# Altium PCB core_layer.PcbDoc
Units mm, origin at the board's own origin, x right, y up, seen from the top; angles counter-clockwise.
Board outline 117.5 x 67.25 mm, 2 copper layers (Top Layer, Bottom Layer); 38 components, 132 nets, 247 pads, 45 vias.
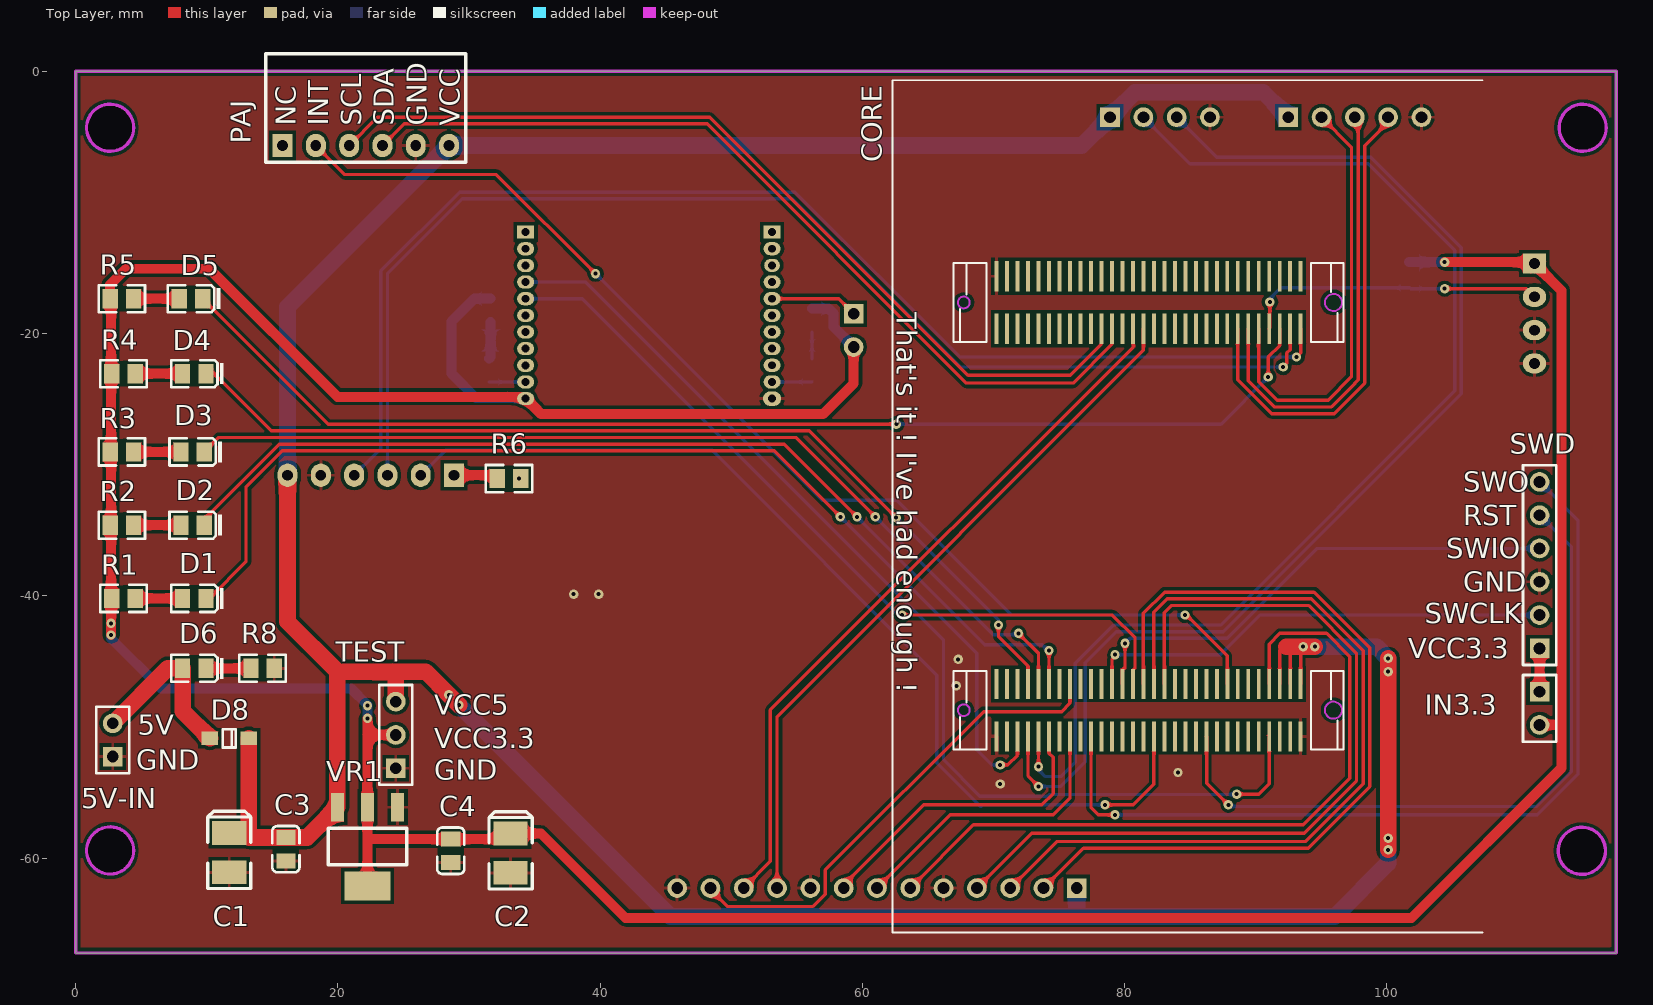
[diagram p0: Top Layer view]
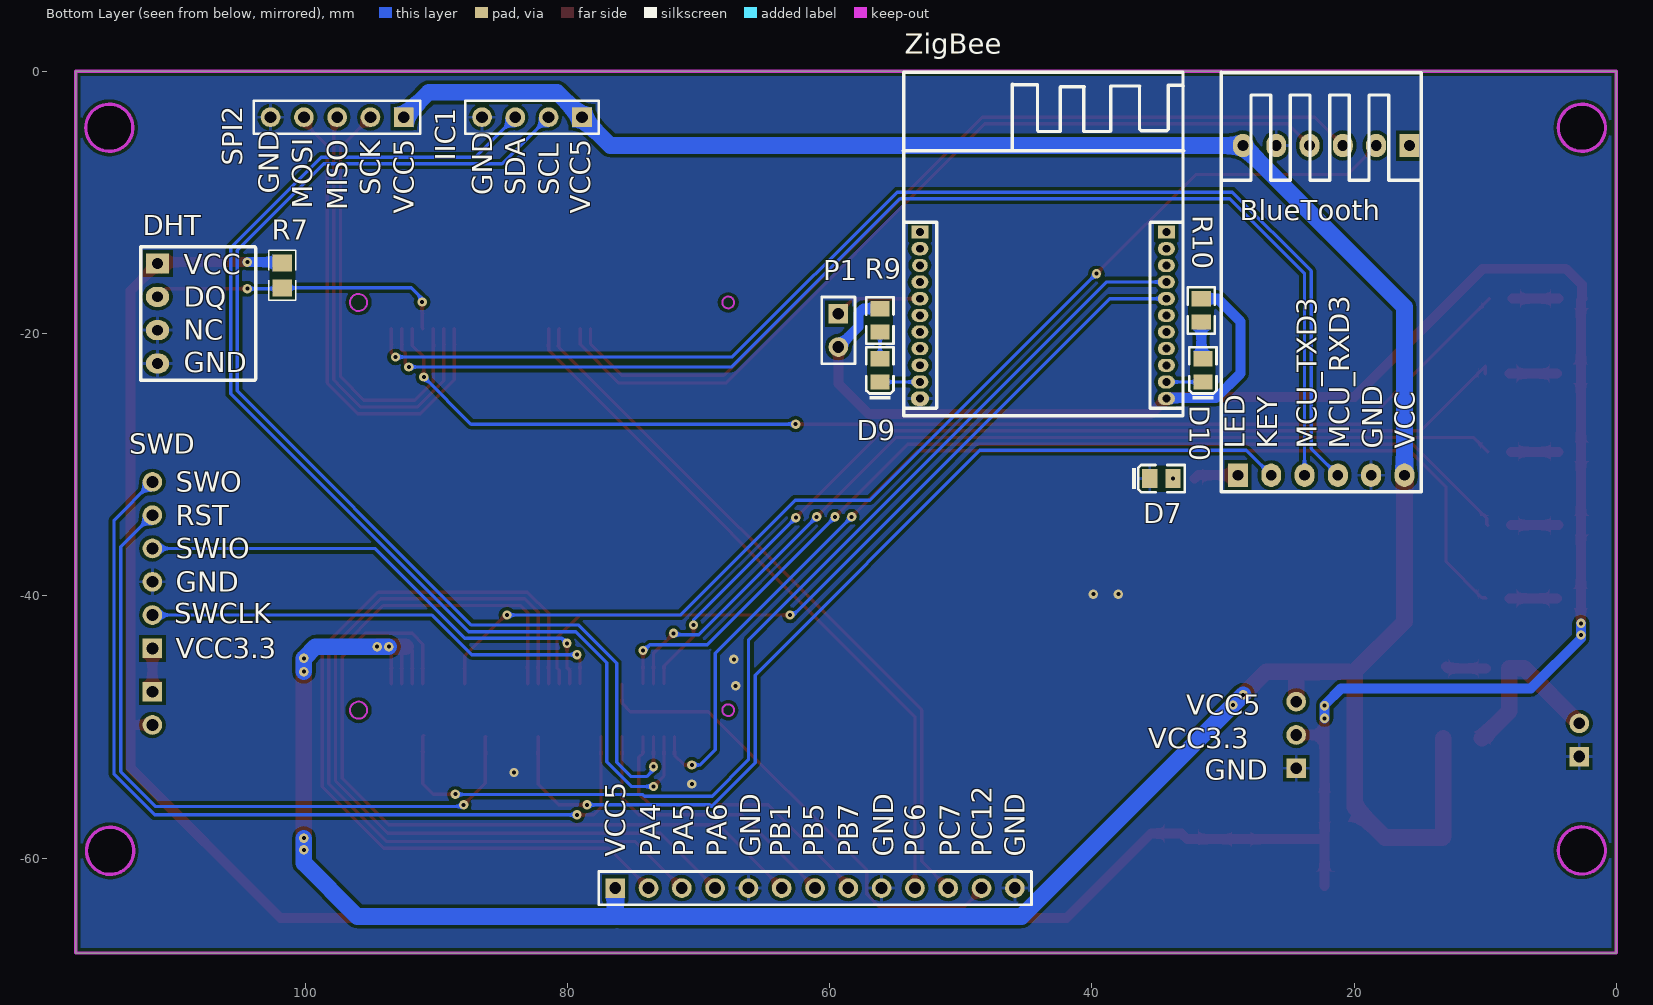
[diagram p1: Bottom Layer view, seen from below]
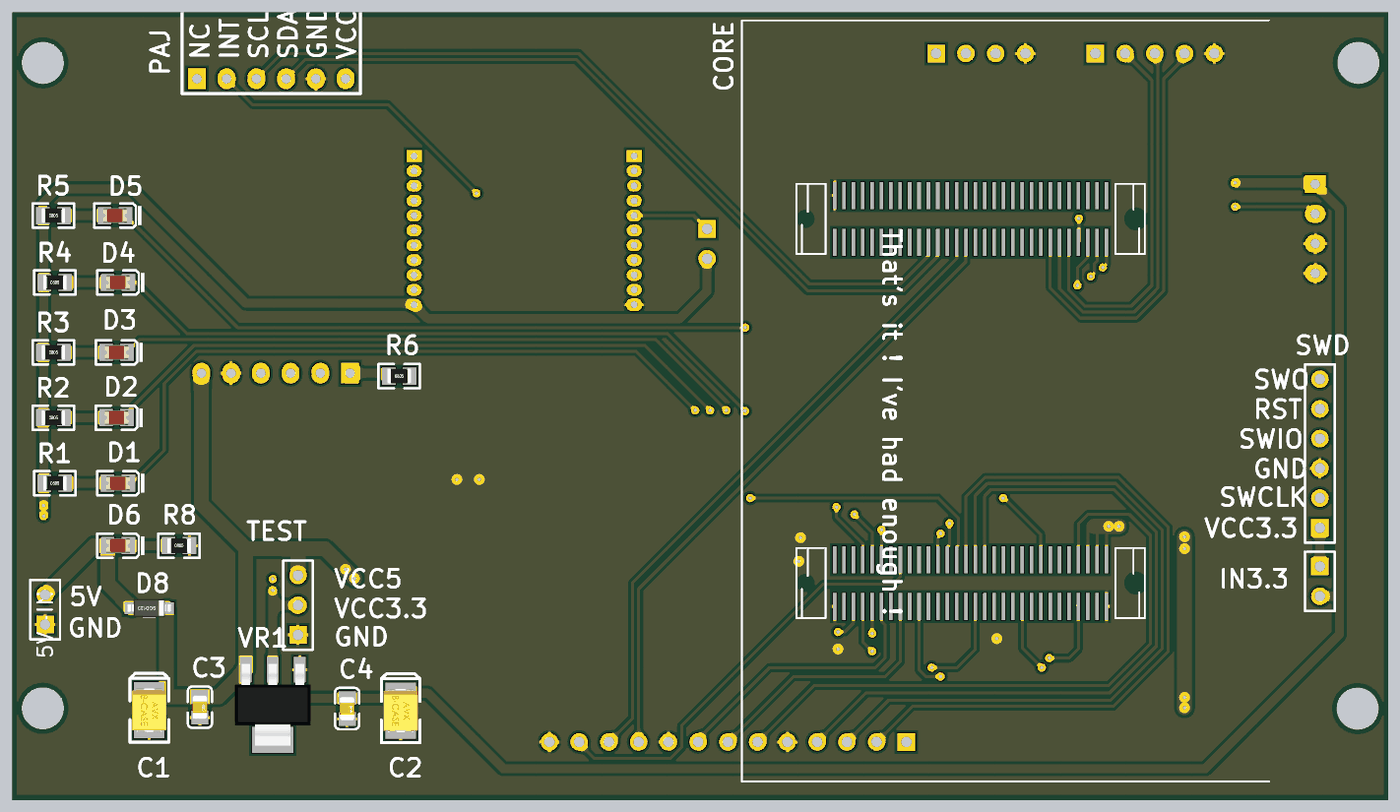
[diagram p2: 3D render of the assembled board from above, using the file's embedded part models]

## Layer stack, top to bottom
Top Solder: solder mask 0.0102, Solder Resist, Dk 3.5
Top Layer: signal copper 0.0356
Dielectric 1: dielectric 0.32, FR-4, Dk 4.8
Bottom Layer: signal copper 0.0356
Bottom Solder: solder mask 0.0102, Solder Resist, Dk 3.5

## Board outline
0,-67.25 117.5,-67.25 117.5,0 0,0
cut-out: 113.08,-59.45 ccw(c114.88,-59.45) 114.88,-61.25 ccw(c114.88,-59.45) 116.68,-59.45 ccw(c114.88,-59.45) 114.88,-57.65 ccw(c114.88,-59.45)
cut-out: 113.14,-4.3 ccw(c114.94,-4.3) 114.94,-6.1 ccw(c114.94,-4.3) 116.74,-4.3 ccw(c114.94,-4.3) 114.94,-2.5 ccw(c114.94,-4.3)
cut-out: 2.62,-61.225 cw(c2.62,-59.425) 0.82,-59.425 cw(c2.62,-59.425) 2.62,-57.625 cw(c2.62,-59.425) 4.42,-59.425 cw(c2.62,-59.425)
cut-out: 2.62,-6.1 cw(c2.62,-4.3) 0.82,-4.3 cw(c2.62,-4.3) 2.62,-2.5 cw(c2.62,-4.3) 4.42,-4.3 cw(c2.62,-4.3)

## Design rules (kind name [scope] priority, off if disabled: settings)
Clearance [All] p1: gap=0.254 ignorepadtopadclearanceinfootprint=TRUE except(0: Arc-Hole Track-Hole SMDPad-Hole THPad-Hole Via-Hole Fill-Hole Poly-Hole Region-Hole Text-Hole)
PolygonConnect [All] p1: connectstyle=Relief reliefconductorwidth=0.254 reliefentries=4 polygonreliefangle="90 Angle" airgapwidth=0.254
RoutingVias [All] p1: holewidth=0.711 width=1.27 viastyle="Through Hole" minholewidth=0.711 minwidth=1.27 maxholewidth=0.711 maxwidth=1.27
SolderMaskExpansion [All] p1: expansion=0.102
Width [All] p1: maxlimit=1.27 minlimit=0.254 preferedwidth=0.762
30 further rules are at their usual default settings.

## Classes and differential pairs
component class core_layer: 5V-IN CORE D1 D2 D3 D4 D5 D6 D9 D10 DHT IIC1 IN3.3 M1 PAJ R1 R2 R3 R4 R5 R7 SPI2 SWD TEST

## Components (designator, comment, footprint, x,y, rotation, side; value= is the part's Value field where it differs from the comment)
5V-IN "Header 2" HDR2X1_A 2.819,-52.264 r90 top
BlueTooth "ATK-BC05-V12" ATK-BC05-V12 28.854,-30.801 r90 bottom
C1 "100uF (107) ±10% 6.3V" CASE-B_3528 11.709,-59.592 r90 top
C2 "100uF (107) ±10% 6.3V" CASE-B_3528 33.172,-59.63 r90 top
C3 "100nF(104) 10% 50V" 0805_C 16.027,-59.326 r270 top
C4 "100nF(104) 10% 50V" 0805_C 28.6,-59.446 r270 top
CORE "STM32F4&F7_CB" STM32F4&F7_CB 93.433,-50.725 r90 top
D1 "黄灯 0805" 0805_LED_S1 9.042,-40.199 r180 top
D2 "黄灯 0805" 0805_LED_S1 8.915,-34.611 r180 top
D3 "黄灯 0805" 0805_LED_S1 8.915,-29.023 r180 top
D4 "黄灯 0805" 0805_LED_S1 9.042,-23.054 r180 top
D5 "黄灯 0805" 0805_LED_S1 8.788,-17.339 r180 top
D6 "红灯 0805" 0805_LED_S1 9.042,-45.533 r180 top
D7 "红灯 0805" 0805_LED_S1 34.696,-31.055 r180 bottom
D8 "B5819W  SL" SOD-123 11.709,-50.867 r180 top
D9 "红灯 0805" 0805_LED_S1 56.159,-22.8 r90 bottom
D10 "红灯 0805" 0805_LED_S1 31.521,-22.8 r90 bottom
DHT "DHT11" DTH11 110.261,-17.466 r180 bottom
IIC1 "Header 4" HDR1X4 78.892,-3.496 r0 bottom
IN3.3 "Header 2" HDR1X2 111.658,-47.311 r270 top
P1 "Header 2" HDR1X2 59.334,-18.482 r270 bottom
PAJ "ATK-PAJ7620U2" ATK-AJ7620U2 15.773,-5.655 r90 top
R1 "4.7KΩ (4701) ±1%" 0805_R 3.642,-40.199 r0 top
R2 "4.7KΩ (4701) ±1%" 0805_R 3.515,-34.611 r0 top
R3 "4.7KΩ (4701) ±1%" 0805_R 3.515,-29.023 r0 top
R4 "4.7KΩ (4701) ±1%" 0805_R 3.642,-23.054 r0 top
R5 "4.7KΩ (4701) ±1%" 0805_R 3.515,-17.339 r0 top
R6 "4.7KΩ (4701) ±1%" 0805_R 33.045,-31.055 r0 top
R7 "Res1" 0805-1 101.752,-15.561 r270 bottom value=4.7K
R8 "10KΩ (1002) ±1%" 0805_R 14.249,-45.533 r0 top
R9 "4.7KΩ (4701) ±1%" 0805_R 56.159,-18.99 r270 bottom
R10 "4.7KΩ (4701) ±1%" 0805_R 31.648,-18.228 r90 bottom
SPI2 "Header 5" HDR1X5 92.481,-3.496 r0 bottom
SWD "Header 6" HDR1X6 111.658,-44.009 r90 top
TEST "Header 3" HDR1X3 24.409,-53.153 r90 top
VR1 "AMS1117-3.3" SOT-223 22.25,-59.122 r90 top
ZigBee "ZigBeeXL2530-D01" "ZigBee XL2530-D01" 43.637,-26.285 r180 bottom
? "Header 13" HDR1X13 76.352,-62.297 r180 bottom

## Footprints (in the part's own frame and the unit in brackets; to place one, negate y for a bottom-side part, rotate by r counter-clockwise, add the part's x,y. Pads: shape width x height; smd on the part's side, far side on the other; paste and mask are expansions set on the pad)
0805-1 [mm] "贴片带丝印"
  rect 1.3x1.5 smd: 1(-0.95,0) 2(0.95,0)
  silkscreen extent -1.91,-1.02 1.91,1.02, body extent -1.14,-0.51 1.14,0.51, height 1
0805_C [mm]
  rect 1.16x1.47 smd: 1(-0.89,0) 2(0.89,0)
  silkscreen extent -1.77,-1.04 1.77,1.04, body extent -1,-0.62 1,0.63, height 0.77
0805_LED_S1 [mm]
  rect 1.16x1.47 smd: A(0.89,0) K(-0.89,0)
  silkscreen extent -2.25,-1.04 1.77,1.03, body extent -1.01,-0.62 1.01,0.62, height 1.1
0805_R [mm]
  rect 1.16x1.47 smd: 1(-0.89,0) 2(0.89,0)
  silkscreen extent -1.77,-1.04 1.77,1.03, body extent -1,-0.62 1,0.63, height 0.49
ATK-AJ7620U2 [mil]
  rect 70x60 hole 32: 1(0,0)
  oval 70x60 hole 32: 2(0,-100) 3(0,-200) 4(0,-300) 5(0,-400) 6(0,-500)
  silkscreen extent -50,-550 276,50
ATK-BC05-V12 [mil]
  rect 70x60 hole 32: 1(0,0)
  oval 70x60 hole 32: 2(0,-100) 3(0,-200) 4(0,-300) 5(0,-400) 6(0,-500)
  silkscreen extent -50,-550 1210,50
CASE-B_3528 [mm]
  rect 1.8x2.6 smd: 1(1.5,0) 2(-1.5,0)
  silkscreen extent -2.73,-1.65 3.16,1.65, body extent -1.85,-1.47 1.85,1.46, height 2.03
DTH11 [mil]
  rect 70x60 hole 32: 1(-39.37,110.63)
  oval 70x60 hole 32: 2(-39.37,10.63) 3(-39.37,-89.37) 4(-39.37,-189.37)
  silkscreen extent -89,-239 256,161
HDR1X2 [mm] "Connector; Header; 2 Position"
  rect 1.5x1.5 hole 0.9: 1(0,0)
  round 1.5 hole 0.9: 2(2.54,0)
  silkscreen extent -1.27,-1.27 3.81,1.27
HDR1X3 [mm] "Connector; Header; 3 Position"
  rect 1.5x1.5 hole 0.9: 1(0,0)
  round 1.5 hole 0.9: 2(2.54,0) 3(5.08,0)
  silkscreen extent -1.27,-1.27 6.35,1.27
HDR1X4 [mm]
  rect 1.5x1.5 hole 0.9: 1(0,0)
  round 1.5 hole 0.9: 2(2.54,0) 3(5.08,0) 4(7.62,0)
  silkscreen extent -1.27,-1.27 8.89,1.27
HDR1X5 [mm] "Connector; Header; 5 Position"
  rect 1.5x1.5 hole 0.9: 1(0,0)
  round 1.5 hole 0.9: 2(2.54,0) 3(5.08,0) 4(7.62,0) 5(10.16,0)
  silkscreen extent -1.27,-1.27 11.43,1.27
HDR1X6 [mm] "Connector; Header; 6 Position"
  rect 1.5x1.5 hole 0.9: 1(0,0)
  round 1.5 hole 0.9: 2(2.54,0) 3(5.08,0) 4(7.62,0) 5(10.16,0) 6(12.7,0)
  silkscreen extent -1.27,-1.27 13.97,1.27
HDR1X13 [mm] "Connector; Header; 13 Position"
  rect 1.5x1.5 hole 0.9: 1(0,0)
  round 1.5 hole 0.9: 2(2.54,0) 3(5.08,0) 4(7.62,0) 5(10.16,0) 6(12.7,0) 7(15.24,0) 8(17.78,0) 9(20.32,0) 10(22.86,0) 11(25.4,0) 12(27.94,0) 13(30.48,0)
  silkscreen extent -1.27,-1.27 31.75,1.27
HDR2X1_A [mm] "Connector; Header; 2 Position"
  rect 1.5x1.5 hole 0.9: 1(0,0)
  round 1.5 hole 0.9: 2(2.54,0)
  silkscreen extent -1.27,-1.27 3.81,1.27
SOD-123 [mm]
  rect 1.25x1 smd: 1(1.475,0) 2(-1.475,0)
  silkscreen extent -0.5,-0.7 0.5,0.7, body extent -1.85,-0.77 1.85,0.78, height 1.35
SOT-223 [mm]
  rect 2.2x1 smd: 1(3,-2.3) 2(3,0) 3(3,2.3)
  rect 2.2x3.5 smd: 2(-3,0)
  silkscreen extent -1.4,-3 1.4,3, body extent -3.49,-3.24 3.49,3.24, height 1.64
STM32F4&F7_CB [mm]
  rect 2.3x0.3 smd: J1_1(0,0) J1_2(0,0.8) J1_3(0,1.6) J1_4(0,2.4) J1_5(0,3.2) J1_6(0,4) J1_7(0,4.8) J1_8(0,5.6) J1_9(0,6.4) J1_10(0,7.2) J1_11(0,8) J1_12(0,8.8) J1_13(0,9.6) J1_14(0,10.4) J1_15(0,11.2) J1_16(0,12) J1_17(0,12.8) J1_18(0,13.6) J1_19(0,14.4) J1_20(0,15.2) J1_21(0,16) J1_22(0,16.8) J1_23(0,17.6) J1_24(0,18.4) J1_25(0,19.2) J1_26(0,20) J1_27(0,20.8) J1_28(0,21.6) J1_29(0,22.4) J1_30(0,23.2) J1_31(4,23.2) J1_32(4,22.4) J1_33(4,21.6) J1_34(4,20.8) J1_35(4,20) J1_36(4,19.2) J1_37(4,18.4) J1_38(4,17.6) J1_39(4,16.8) J1_40(4,16) J1_41(4,15.2) J1_42(4,14.4) J1_43(4,13.6) J1_44(4,12.8) J1_45(4,12) J1_46(4,11.2) J1_47(4,10.4) J1_48(4,9.6) J1_49(4,8.8) J1_50(4,8) J1_51(4,7.2) J1_52(4,6.4) J1_53(4,5.6) J1_54(4,4.8) J1_55(4,4) J1_56(4,3.2) J1_57(4,2.4) J1_58(4,1.6) J1_59(4,0.8) J1_60(4,0) J2_1(31.1,0.001) J2_2(31.1,0.801) J2_3(31.1,1.601) J2_4(31.1,2.401) J2_5(31.1,3.201) J2_6(31.1,4.001) J2_7(31.1,4.801) J2_8(31.1,5.601) J2_9(31.1,6.401) J2_10(31.1,7.201) J2_11(31.1,8.001) J2_12(31.1,8.801) J2_13(31.1,9.601) J2_14(31.1,10.401) J2_15(31.1,11.201) J2_16(31.1,12.001) J2_17(31.1,12.801) J2_18(31.1,13.601) J2_19(31.1,14.401) J2_20(31.1,15.201) J2_21(31.1,16.001) J2_22(31.1,16.801) J2_23(31.1,17.601) J2_24(31.1,18.401) J2_25(31.1,19.201) J2_26(31.1,20.001) J2_27(31.1,20.801) J2_28(31.1,21.601) J2_29(31.1,22.401) J2_30(31.1,23.201) J2_31(35.1,23.201) J2_32(35.1,22.401) J2_33(35.1,21.601) J2_34(35.1,20.801) J2_35(35.1,20.001) J2_36(35.1,19.201) J2_37(35.1,18.401) J2_38(35.1,17.601) J2_39(35.1,16.801) J2_40(35.1,16.001) J2_41(35.1,15.201) J2_42(35.1,14.401) J2_43(35.1,13.601) J2_44(35.1,12.801) J2_45(35.1,12.001) J2_46(35.1,11.201) J2_47(35.1,10.401) J2_48(35.1,9.601) J2_49(35.1,8.801) J2_50(35.1,8.001) J2_51(35.1,7.201) J2_52(35.1,6.401) J2_53(35.1,5.601) J2_54(35.1,4.801) J2_55(35.1,4.001) J2_56(35.1,3.201) J2_57(35.1,2.401) J2_58(35.1,1.601) J2_59(35.1,0.801) J2_60(35.1,0.001)
  Keep-Out Layer circle w0.152: c2,25.7 r0.45
  Keep-Out Layer circle w0.152: c2,-2.5 r0.65
  Keep-Out Layer circle w0.152: c33.1,-2.499 r0.65
  Keep-Out Layer circle w0.152: c33.1,25.701 r0.45
  silkscreen extent -14.95,-13.87 50.05,31.13
"ZigBee XL2530-D01" [mm]
  rect 1.3x1 hole 0.6: 1(9.322,14.028) 22(-9.474,14.028)
  oval 1.3x1 hole 0.6: 2(9.322,12.756) 3(9.322,11.486) 4(9.322,10.216) 5(9.322,8.946) 6(9.322,7.676) 7(9.322,6.406) 8(9.322,5.136) 9(9.322,3.866) 10(9.322,2.596) 11(9.322,1.326) 13(-9.474,2.598) 14(-9.474,3.868) 15(-9.474,5.138) 16(-9.474,6.408) 17(-9.474,7.678) 18(-9.474,8.948) 19(-9.474,10.218) 21(-9.474,12.758)
  oval 1.4x1.1 hole 0.6: 12(-9.474,1.326)
  oval 1.2x1 hole 0.6: 20(-9.474,11.488)
  silkscreen extent -10.75,0.03 10.65,26.22

## Part data
5V-IN: "接插件", LatestRevisionDate=17-Jul-2002, LatestRevisionNote="Re-released for DXP Platform.", Publisher="Altium Limited"
C1 C2: library part "3528 100uF (107) 10% 6.3V", "钽电容", Package=3528, SuppliersPartNumber=C16133, ComponentLink1Description=供应商, ComponentLink1URL=http://www.szlcsc.com/product/details_16815.html, Supplier=LC
C3 C4: library part "0805 100nF(104) 10% 50V", "贴片电容", Package=0805, SuppliersPartNumber=C49678, ComponentLink1Description=供应商, ComponentLink1URL=http://www.szlcsc.com/product/details_50686.html, Supplier=LC
CORE: "F429/746 Core Board"
D1 D2 D3 D4 D5: library part "0805 黄灯", "发光二极管", Package=0805, SuppliersPartNumber=C2296, ComponentLink1Description=供应, ComponentLink1URL=http://www.szlcsc.com/product/details_2669.html, Supplier=LC
D6 D7 D9 D10: library part "0805 红灯", "发光二极管", Package=0805, SuppliersPartNumber=C2295, ComponentLink1URL=http://www.szlcsc.com/product/details_2668.html, Supplier=LC
  D6 D9 D10: ComponentLink1Description=供应
  D7: ComponentLink1Description=供应商
D8: library part "SOD-123 B5819W  SL", "肖特基二极管", Package=SOD-123, SuppliersPartNumber=C8598, ComponentLink1Description=供应商, ComponentLink1URL=http://www.szlcsc.com/product/details_9093.html, Supplier=LC
IIC1: "Header, 4-Pin", LatestRevisionDate=17-Jul-2002, LatestRevisionNote="Re-released for DXP Platform.", Publisher="Altium Limited"
IN3.3 P1: "Header, 2-Pin", LatestRevisionDate=17-Jul-2002, LatestRevisionNote="Re-released for DXP Platform.", Publisher="Altium Limited"
R1 R2 R3 R4 R5 R6 R9 R10: library part "0805 4.7KΩ (4701) 1%", "贴片电阻", Package=0805, SuppliersPartNumber=C17673, ComponentLink1URL=http://www.szlcsc.com/product/details_18361.html, Supplier=LC
  R1 R2 R3 R4 R5: ComponentLink1Description=供应
  R6 R9 R10: ComponentLink1Description=供应商
R7: "贴片电阻", LatestRevisionDate=17-Jul-2002, LatestRevisionNote="Re-released for DXP Platform.", PackageReference=AXIAL-0.4, Published=8-Jun-2000, Publisher="Altium Limited"
R8: library part "0805 10KΩ (1002) 1%", "贴片电阻", Package=0805, SuppliersPartNumber=C17414, ComponentLink1Description=供应商, ComponentLink1URL=http://www.szlcsc.com/product/details_18102.html, Supplier=LC
SPI2: "Header, 5-Pin", LatestRevisionDate=17-Jul-2002, LatestRevisionNote="Re-released for DXP Platform.", Publisher="Altium Limited"
SWD: "Header, 6-Pin", LatestRevisionDate=17-Jul-2002, LatestRevisionNote="Re-released for DXP Platform.", Publisher="Altium Limited"
TEST: "Header, 3-Pin", LatestRevisionDate=17-Jul-2002, LatestRevisionNote="Re-released for DXP Platform.", Publisher="Altium Limited"
VR1: library part "SOT-223 AMS1117-3.3", "低压差线性稳压(LDO)", Package=SOT-223, SuppliersPartNumber=C6186, ComponentLink1Description=供应商, ComponentLink1URL=http://www.szlcsc.com/product/details_6652.html, Supplier=LC
?: "Header, 13-Pin", LatestRevisionDate=17-Jul-2002, LatestRevisionNote="Re-released for DXP Platform.", Publisher="Altium Limited"

## Via types
v1: diameter 0.711, hole 0.305, Top Layer to Bottom Layer, 45 vias

## Nets (pads, with @x,y where several pads share a name; then routed paths per layer and width w, separated by ;. In a path a pad name is that pad's centre, name@x,y a point inside that pad or via, vN(x,y) a via of type N, cw(c..) or ccw(c..) an arc to the next point about the centre after c; other vN are vias at no path point)
BC_LED: BlueTooth.1 R6.1 | length 3.4
  Top Layer w0.762: BlueTooth.1 31.901,-30.801 R6.1
BOOT0: CORE.J1_31
GND: 5V-IN.1 ?.5 ?.9 ?.13 BlueTooth.5 C1.2 C2.2 C3.2 C4.2 CORE.J1_1 CORE.J1_30 CORE.J2_31 D7.K DHT.3 DHT.4 IIC1.4 PAJ.5 R8.2 SPI2.5 SWD.3 TEST.1 VR1.1 ZigBee.12
  other v1: 70.51,-54.356 84.074,-53.473 67.17,-46.863 67.31,-44.85 37.973,-39.878 39.887,-39.878
IIC_SCL: CORE.J1_26 IIC1.2 | length 89.8
  Top Layer w0.254: v1(73.431,-53.026) 73.433,-53.024 CORE.J1_26
  Bottom Layer w0.254: v1(73.431,-53.026) 73.431,-53.28 73.71,-53.559 73.736,-53.559 73.965,-53.788 75.126,-53.788 76.225,-52.689 76.225,-45.152 79.146,-42.231 87.318,-42.231 105.181,-24.368 105.181,-13.656 98.577,-7.052 84.988,-7.052 IIC1.2
IIC_SDA: CORE.J1_27 IIC1.3 | length 90.2
  Top Layer w0.254: CORE.J1_27 72.633,-53.748 v1(73.431,-54.546)
  Bottom Layer w0.254: v1(73.431,-54.546) 75.086,-54.546 76.987,-52.645 76.987,-45.108 79.356,-42.739 87.528,-42.739 105.689,-24.578 105.689,-13.446 98.787,-6.544 87.02,-6.544 IIC1.3
LED1: CORE.J1_28 D1.K | length 85.8
  Top Layer w0.254: D1.K 9.992,-40.139 10.245,-40.139 12.979,-37.405 12.979,-31.69 12.986,-31.69 15.738,-28.938 53.28,-28.938 v1(58.318,-33.976) ; v1(70.51,-52.899) 71.08,-52.899 71.833,-52.146 CORE.J1_28
  Bottom Layer w0.254: v1@58.381,-34.04 68.732,-44.39 68.732,-51.756 69.875,-52.899 v1(70.51,-52.899)
LED2: CORE.J1_36 D2.K | length 76.4
  Top Layer w0.254: D2.K 9.865,-34.551 9.865,-34.086 15.521,-28.43 54.042,-28.43 v1(59.588,-33.976) ; v1@74.197,-44.212 v1(74.233,-44.176) CORE.J1_36
  Bottom Layer w0.254: v1(59.588,-33.976) 69.342,-43.73 73.71,-43.73 74.157,-44.176 v1(74.233,-44.176)
LED3: CORE.J1_35 D3.K | length 73.3
  Top Layer w0.254: D3.K 10.906,-27.922 54.931,-27.922 v1(60.985,-33.976) ; v1(71.907,-42.866) 73.433,-44.392 CORE.J1_35
  Bottom Layer w0.254: v1(60.985,-33.976) 69.977,-42.968 71.805,-42.968 v1(71.907,-42.866)
LED4: CORE.J1_34 D4.K | length 74.8
  Top Layer w0.254: D4.K@9.992,-23.054 9.992,-22.485 14.921,-27.414 55.947,-27.414 v1(62.572,-34.04) ; v1(70.383,-42.231) 70.383,-43.12 72.633,-45.37 CORE.J1_34
  Bottom Layer w0.254: v1(62.572,-34.04) 70.383,-41.85 v1(70.383,-42.231)
LED5: CORE.J2_3 D5.K | length 90.8
  Top Layer w0.254: D5.K 19.245,-26.906 v1(62.594,-26.906) ; v1(90.957,-23.308) 90.957,-21.784 91.832,-20.909 CORE.J2_3
  Bottom Layer w0.254: v1(62.594,-26.906) 87.359,-26.906 v1(90.957,-23.308)
Net5V-IN_2: 5V-IN.2 D6.A D8.1 | length 13.3
  Top Layer w1.27: 5V-IN.2 7.01,-45.533 D6.A 8.152,-48.785 D8.1
NetD1_A: D1.A R1.2 | length 3.6
  Top Layer w0.762: R1.2 D1.A
NetD2_A: D2.A R2.2 | length 3.6
  Top Layer w0.762: R2.2 D2.A
NetD3_A: D3.A R3.2 | length 3.6
  Top Layer w0.762: R3.2 D3.A
NetD4_A: D4.A R4.2 | length 3.6
  Top Layer w0.762: R4.2 D4.A
NetD5_A: D5.A R5.2 | length 3.5
  Top Layer w0.762: R5.2 D5.A
NetD6_K: D6.K R8.1 | length 3.1
  Top Layer w0.762: D6.K 12.851,-45.533 R8.1@12.978,-45.406
NetD7_A: D7.A R6.2
  other v1: 33.806,-31.055
NetD9_A: D9.A R9.2 | length 2
  Bottom Layer w0.254: D9.A R9.2
NetD9_K: D9.K ZigBee.13 | length 3
  Bottom Layer w0.254: ZigBee.13 56.156,-23.687 D9.K
NetD10_A: D10.A R10.1 | length 2.8
  Bottom Layer w0.762: D10.A 31.648,-21.783 R10.1
NetD10_K: D10.K ZigBee.10 | length 2.8
  Bottom Layer w0.254: D10.K ZigBee.10 ZigBee.10
NetIN3.3_1: IN3.3.1 SWD.1 | length 3.3
  Top Layer w0.762: IN3.3.1 SWD.1
NetP1_1: P1.1 ZigBee.18 | length 6.7
  Top Layer w0.254: ZigBee.18 58.189,-17.337 P1.1
PA0: CORE.J2_42
PA1: CORE.J1_3
PA2: CORE.J1_4 ZigBee.4 | length 82.5
  Top Layer w0.254: v1(88.544,-55.134) 90.246,-55.134 91.033,-54.347 CORE.J1_4 CORE.J1_4@90.957,-50.649
  Bottom Layer w0.254: ZigBee.4 38.887,-16.069 66.192,-43.374 66.192,-52.518 68.957,-55.283 74.117,-55.283 74.24,-55.16 88.569,-55.16 v1(88.544,-55.134)
PA3: CORE.J1_44 ZigBee.5 | length 60.8
  Top Layer w0.254: v1(63.017,-41.469) 79.071,-41.469 80.797,-43.195 80.797,-45.496 80.633,-45.66 CORE.J1_44
  Bottom Layer w0.254: ZigBee.5 38.633,-17.339 62.763,-41.469 v1(63.017,-41.469)
PA4: ?.2 CORE.J1_45 | length 63.8
  Top Layer w0.254: ?.2 76.86,-59.249 94.001,-59.249 98.704,-54.546 98.704,-43.969 94.451,-39.716 83.052,-39.716 81.433,-41.336 CORE.J1_45
PA5: ?.3 CORE.J1_46 | length 63.9
  Top Layer w0.254: ?.3 74.828,-58.741 93.791,-58.741 98.196,-54.336 98.196,-44.18 94.241,-40.224 83.263,-40.224 82.233,-41.254 CORE.J1_46
PA6: ?.4 CORE.J1_47 | length 63.9
  Top Layer w0.254: ?.4 72.923,-58.106 93.707,-58.106 97.688,-54.125 97.688,-44.39 94.03,-40.732 83.593,-40.732 83.033,-41.292 CORE.J1_47
PA7: CORE.J1_48
PA8: CORE.J2_20 PAJ.3 | length 68.6
  Top Layer w0.254: PAJ.3 23.012,-3.496 48.368,-3.496 68.053,-23.181 75.844,-23.181 78.232,-20.793 CORE.J2_20
PA9: CORE.J1_51
PA10: CORE.J1_52
PA11: CORE.J1_53 PAJ.2 | length 87.8
  Top Layer w0.254: PAJ.2 20.528,-7.87 32.085,-7.87 v1(39.649,-15.434) ; v1(84.607,-41.469) 84.734,-41.469 87.833,-44.568 CORE.J1_53
  Bottom Layer w0.254: v1(39.649,-15.434) 56.921,-32.706 62.636,-32.706 71.399,-41.469 v1(84.607,-41.469)
PA12: CORE.J1_54
PA13: CORE.J1_43 SWD.4 | length 37.8
  Top Layer w0.254: CORE.J1_43 79.833,-45.66 80.035,-45.458 v1(80.035,-43.628)
  Bottom Layer w0.254: v1(80.035,-43.628) 80.416,-43.247 87.826,-43.247 94.684,-36.389 SWD.4
PA14: CORE.J1_42 SWD.2 | length 36
  Top Layer w0.254: CORE.J1_42 79.033,-44.884 79.273,-44.644 v1(79.273,-44.492)
  Bottom Layer w0.254: v1(79.273,-44.492) 87.299,-44.492 90.322,-41.469 SWD.2
PA15: CORE.J1_41
PB0: CORE.J1_56
PB1: ?.6 CORE.J1_57 | length 56.5
  Top Layer w0.254: ?.6 68.474,-57.475 93.62,-57.475 97.18,-53.915 97.18,-44.644 95.402,-42.866 91.846,-42.866 91.033,-43.679 CORE.J1_57
PB2: CORE.J1_55
PB3: CORE.J1_21 SWD.6 | length 67.6
  Top Layer w0.254: CORE.J1_21 77.433,-56.139 78.003,-56.709 v1(79.273,-56.709)
  Bottom Layer w0.254: v1(79.273,-56.709) 111.487,-56.709 114.579,-53.617 114.579,-34.23 SWD.6
PB4: CORE.J1_22
PB5: ?.7 CORE.J1_23 | length 22.3
  Top Layer w0.254: ?.7 66.7,-56.709 74.574,-56.709 75.833,-55.45 CORE.J1_23
PB6: CORE.J1_24
PB7: ?.8 CORE.J1_25 | length 23.6
  Top Layer w0.254: ?.8 58.572,-62.043 64.668,-55.947 73.685,-55.947 74.549,-55.083 74.549,-52.326 74.233,-52.01 CORE.J1_25
PB10: BlueTooth.3 CORE.J2_2 | length 94.6
  Top Layer w0.254: v1(92.1,-22.546) 92.379,-22.267 92.379,-21.479 92.632,-21.226 CORE.J2_2
  Bottom Layer w0.254: BlueTooth.3 23.774,-15.434 29.489,-9.719 54.635,-9.719 67.462,-22.546 v1(92.1,-22.546) v1@92.075,-22.571
PB11: BlueTooth.4 CORE.J2_1 | length 96.3
  Top Layer w0.254: v1(93.116,-21.784) 93.432,-21.468 CORE.J2_1
  Bottom Layer w0.254: BlueTooth.4 23.266,-28.769 23.266,-15.224 29.279,-9.211 54.845,-9.211 67.418,-21.784 v1(93.116,-21.784)
PB12: CORE.J2_4 DHT.2 R7.2 | length 23.1
  Top Layer w0.254: CORE.J2_4 91.084,-19.573 v1(91.084,-17.593) ; v1(104.419,-16.577) 110.642,-16.577 DHT.2
  Bottom Layer w0.254: v1(91.084,-17.593) 91.084,-17.339 91.912,-16.511 R7.2 101.818,-16.577 v1(104.419,-16.577)
PB13: CORE.J2_5 SPI2.2 | length 33.2
  Top Layer w0.254: CORE.J2_5 90.22,-19.637 90.22,-23.675 91.632,-25.086 95.529,-25.086 97.307,-23.308 97.307,-5.782 SPI2.2
PB14: CORE.J2_6 SPI2.3 | length 34.2
  Top Layer w0.254: CORE.J2_6 89.432,-23.605 91.421,-25.594 95.783,-25.594 97.561,-23.816 97.561,-23.772 97.815,-23.518 97.815,-3.75 SPI2.3
PB15: CORE.J2_7 SPI2.4 | length 36.6
  Top Layer w0.254: CORE.J2_7 88.632,-23.523 91.211,-26.102 95.993,-26.102 98.323,-23.772 98.323,-5.655 100.101,-3.877 SPI2.4
PC1: CORE.J1_9
PC4: CORE.J1_49
PC5: CORE.J1_50
PC6: ?.10 CORE.J2_16 | length 54.2
  Top Layer w0.254: ?.10 53.492,-49.216 81.432,-21.276 CORE.J2_16
PC7: ?.11 CORE.J2_17 | length 55
  Top Layer w0.254: ?.11 52.984,-60.265 52.984,-48.708 80.67,-21.022 80.67,-19.663 CORE.J2_17
PC8: CORE.J2_18
PC9: CORE.J2_19 PAJ.4 | length 66.9
  Top Layer w0.254: PAJ.4 25.044,-4.004 48.158,-4.004 67.926,-23.772 76.079,-23.772 79.032,-20.819 CORE.J2_19
PC10: CORE.J1_40
PC11: CORE.J1_39
PC12: ?.12 CORE.J1_38 | length 37.1
  Top Layer w0.254: ?.12 48.412,-62.424 49.682,-63.694 56.234,-63.694 57.163,-62.765 57.163,-60.912 69.24,-48.835 75.209,-48.835 75.833,-48.211 CORE.J1_38
PD0: CORE.J2_47
PD1: CORE.J2_48
PD2: CORE.J1_37
PD4: CORE.J2_26
PD5: CORE.J2_22
PD6: CORE.J2_27
PD8: CORE.J2_58
PD9: CORE.J2_59
PD10: CORE.J2_60
PD11: CORE.J2_23
PD12: CORE.J2_21
PD13: CORE.J2_14
PD14: CORE.J2_45
PD15: CORE.J2_46
PE0: CORE.J2_43
PE1: CORE.J2_44
PE2: CORE.J1_20
PE3: CORE.J1_19
PE4: CORE.J1_18
PE5: CORE.J1_17
PE6: CORE.J1_16
PE7: CORE.J2_49
PE8: CORE.J2_50
PE9: CORE.J2_51
PE10: CORE.J2_52
PE11: CORE.J2_53
PE12: CORE.J2_54
PE13: CORE.J2_55
PE14: CORE.J2_56
PE15: CORE.J2_57
PF6: CORE.J1_14
PF7: CORE.J1_13
PF8: CORE.J1_12
PF9: CORE.J1_11
PG3: CORE.J2_13
PG6: CORE.J2_15
PG11: CORE.J2_35
PG12: CORE.J2_25
PG13: CORE.J1_33
PG14: CORE.J1_32
PH2: CORE.J1_5
PH3: CORE.J1_6
PH4: CORE.J1_8
PH5: CORE.J1_7
PH6: CORE.J2_8
PH7: CORE.J2_9
PH9: CORE.J2_10
PH10: CORE.J2_11
PH11: CORE.J2_12
PH12: CORE.J2_24
PH13: CORE.J2_30
PH14: CORE.J2_29
PH15: CORE.J2_28
PI0: CORE.J2_34
PI1: CORE.J2_33
PI2: CORE.J2_32
PI3: CORE.J2_41
PI4: CORE.J2_36
PI5: CORE.J2_37
PI6: CORE.J2_38
PI7: CORE.J2_39
PI8: CORE.J2_40
PI11: BlueTooth.2 CORE.J1_15 | length 76.2
  Top Layer w0.254: v1(78.511,-55.947) 80.67,-55.947 82.233,-54.384 CORE.J1_15
  Bottom Layer w0.254: BlueTooth.2 28.219,-28.896 48.539,-28.896 65.684,-46.041 65.684,-52.728 69.03,-56.074 69.157,-55.947 v1(78.511,-55.947)
RESET: CORE.J1_10 SWD.5 | length 53.8
  Top Layer w0.254: CORE.J1_10 86.258,-50.75 86.258,-54.296 v1(87.909,-55.947)
  Bottom Layer w0.254: v1(87.909,-55.947) 88.036,-56.074 111.404,-56.074 114.071,-53.407 114.071,-36.262 SWD.5
VBAT: CORE.J1_29
VCC3.3: C2.1 C4.1 DHT.1 IN3.3.2 P1.2 R1.1 R2.1 R3.1 R4.1 R5.1 R7.1 R9.1 R10.2 TEST.2 VR1.2 ZigBee.11 | length 299.6
  Top Layer w0.762: R5.1@2.565,-17.339 2.692,-17.466 2.692,-40.199 v1(2.692,-42.104) v1(2.692,-42.993) ; R5.1 2.625,-16.261 3.833,-15.053 10.185,-15.053 19.956,-24.824 34.18,-24.824 ZigBee.11 35.5,-26.144 57.006,-26.144 59.334,-23.816 P1.2 ; VR1.2@22.25,-62.122 22.25,-58.614 ; v1(22.25,-49.343) 22.25,-50.613 ; TEST.2 22.25,-50.613 ; v1(104.419,-14.545) 111.15,-14.545 DHT.1 113.309,-16.704 113.309,-49.724 ; IN3.3.2 113.182,-49.851 113.309,-49.724 ; 22.25,-58.614 22.25,-56.122 22.25,-50.613 ; 22.25,-58.614 22.308,-58.556 C4.1 32.746,-58.556 C2.1 35.482,-58.13 41.935,-64.583 101.879,-64.583 113.309,-53.153 113.309,-49.724
  Bottom Layer w0.762: v1(2.692,-42.104) v1(2.692,-42.993) 2.692,-43.247 6.502,-47.057 20.98,-47.057 v1@22.25,-48.327 ; v1(22.25,-49.343) v1(22.25,-48.385) ; R10.2 30.396,-17.338 28.672,-19.062 28.672,-23.054 30.523,-24.905 34.18,-24.905 34.18,-24.824 ZigBee.11 ; R9.1 57.428,-18.1 57.81,-18.482 57.81,-19.498 P1.2 ; R7.1@101.686,-14.545 v1(104.419,-14.545)
VCC5: ?.1 BlueTooth.6 C1.1 C3.1 CORE.J1_58 CORE.J1_59 CORE.J1_60 D8.2 IIC1.1 PAJ.6 SPI2.1 TEST.3 VR1.3 | length 267.9
  Top Layer w0.254: CORE.J1_58 91.833,-44.149 ; CORE.J1_59 92.633,-44.161 ; CORE.J1_60 93.433,-44.199
  Top Layer w1.27: D8.2 13.184,-58.387 13.233,-58.436 C3.1 17.636,-58.436 VR1.3 19.95,-45.773 16.154,-41.977 BlueTooth.6 ; 20.458,-45.787 24.155,-45.787 ; TEST.3 24.409,-46.041 24.155,-45.787 ; v1(29.235,-48.327) v1(28.459,-47.551) 26.695,-45.787 24.155,-45.787 ; 92.354,-43.882 v1(93.624,-43.882) v1(94.513,-43.882) ; v1(100.101,-59.376) v1(100.101,-58.487) v1(100.101,-45.787) v1(100.101,-44.771)
  Bottom Layer w1.27: BlueTooth.6 16.154,-17.974 PAJ.6 76.733,-5.655 IIC1.1 80.797,-1.591 90.576,-1.591 SPI2.1 ; v1(28.459,-47.551) v1(29.235,-48.327) 45.364,-64.456 76.098,-64.456 76.352,-64.202 ; ?.1 76.352,-64.202 ; v1(93.624,-43.882) v1(94.513,-43.882) 99.212,-43.882 v1(100.101,-44.771) v1(100.101,-45.787) ; v1(100.101,-58.487) v1(100.101,-59.376) 100.101,-60.392 96.037,-64.456 76.352,-64.456 76.352,-64.202
VREF+: CORE.J1_2
pads on no net: PAJ.1 ZigBee.1 ZigBee.2 ZigBee.3 ZigBee.6 ZigBee.7 ZigBee.8 ZigBee.9 ZigBee.14 ZigBee.15 ZigBee.16 ZigBee.17 ZigBee.19 ZigBee.20 ZigBee.21 ZigBee.22

## Polygon pours and split planes (outlines as drawn)
GND on Top Layer "GND_L01_P002" (solid, pour order 2): 0,0 117.221,0 117.221,-66.971 117.052,-66.802 0,-66.802
GND on Bottom Layer "GND_L02_P004" (solid, pour order 4): 0,-67.056 117.5,-67.056 117.5,-0.381 0,-0.381

## Keep-outs
Keep-Out Layer:
  circle w0.254: c2.62,-59.425 r1.8
  circle w0.254: c114.94,-4.3 r1.8
  circle w0.254: c114.88,-59.45 r1.8
  circle w0.254: c2.62,-4.3 r1.8
  lines w0.254: 0,-67.25 117.5,-67.25 117.5,0 0,0 0,-67.225

## Silkscreen, mask and mechanical layers (free items; w line width, h text height)
Top Overlay:
  text "That's it ! I've had enough !" at 62.636,-18.355 h1.52 r270
  text "SWO" at 105.816,-32.071 h1.52
  text "RST" at 105.816,-34.611 h1.52
  text "SWIO" at 104.546,-37.151 h1.52
  text "GND" at 105.816,-39.691 h1.52
  text "SWCLK" at 102.895,-42.104 h1.52
  text "VCC3.3" at 101.625,-44.771 h1.52
  text "VCC5" at 27.33,-49.089 h1.52
  text "5V" at 4.724,-50.613 h1.52
  text "VCC3.3" at 27.33,-51.629 h1.52
  text "GND" at 4.597,-53.28 h1.52
  text "GND" at 27.33,-54.042 h1.52
Bottom Overlay:
  text "GND" at 102.006,-9.338 h1.52 r270
  text "SCL" at 80.67,-9.465 h1.52 r270
  text "SDA" at 83.21,-9.465 h1.52 r270
  text "GND" at 85.75,-9.465 h1.52 r270
  text "SCK" at 94.259,-9.465 h1.52 r270
  text "MOSI" at 99.466,-10.481 h1.52 r270
  text "MISO" at 96.799,-10.608 h1.52 r270
  text "VCC5" at 78.257,-10.862 h1.52 r270
  text "VCC5" at 91.719,-10.862 h1.52 r270
  text "SWD" at 113.436,-29.15 h1.52
  text "SWO" at 109.88,-32.071 h1.52
  text "RST" at 109.88,-34.611 h1.52
  text "SWIO" at 109.88,-37.151 h1.52
  text "GND" at 109.88,-39.691 h1.52
  text "SWCLK" at 110.007,-42.104 h1.52
  text "VCC3.3" at 109.88,-44.771 h1.52
  text "VCC5" at 32.791,-49.089 h1.52
  text "VCC3.3" at 35.712,-51.629 h1.52
  text "GND" at 31.394,-54.042 h1.52
  text "GND" at 45.11,-59.884 h1.52 r270
  text "PC12" at 47.65,-59.884 h1.52 r270
  text "PC7" at 50.063,-59.884 h1.52 r270
  text "PC6" at 52.73,-59.884 h1.52 r270
  text "GND" at 55.143,-59.884 h1.52 r270
  text "PB7" at 57.81,-59.884 h1.52 r270
  text "PB5" at 60.477,-59.884 h1.52 r270
  text "PB1" at 63.017,-59.884 h1.52 r270
  text "GND" at 65.303,-59.884 h1.52 r270
  text "PA6" at 67.843,-59.884 h1.52 r270
  text "PA5" at 70.383,-59.884 h1.52 r270
  text "PA4" at 72.923,-59.884 h1.52 r270
  text "VCC5" at 75.59,-59.884 h1.52 r270

## Text inside footprints (layer, text, board x,y; h text height)
BlueTooth: Bottom Overlay "VCC" at 15.354,-28.801 h1.52 r270; Bottom Overlay "GND" at 17.854,-28.801 h1.52 r270; Bottom Overlay "MCU_RXD3" at 20.354,-28.801 h1.52 r270; Bottom Overlay "MCU_TXD3" at 22.854,-28.801 h1.52 r270; Bottom Overlay "KEY" at 25.854,-28.801 h1.52 r270; Bottom Overlay "LED" at 28.354,-28.801 h1.52 r270
DHT: Bottom Overlay "VCC" at 109.261,-15.466 h1.52; Bottom Overlay "DQ" at 109.261,-17.966 h1.52; Bottom Overlay "NC" at 109.261,-20.466 h1.52; Bottom Overlay "GND" at 109.261,-22.966 h1.52
PAJ: Top Overlay "NC" at 16.773,-4.155 h1.52 r90; Top Overlay "INT" at 19.273,-4.155 h1.52 r90; Top Overlay "SCL" at 21.773,-4.155 h1.52 r90; Top Overlay "SDA" at 24.273,-4.155 h1.52 r90; Top Overlay "GND" at 26.773,-4.155 h1.52 r90; Top Overlay "VCC" at 29.273,-4.155 h1.52 r90